# Altium PCB arm.PcbDoc
Units mm, origin at the board's own origin, x right, y up, seen from the top; angles counter-clockwise.
Board outline 152.4 x 101.6 mm, 2 copper layers (F.Cu, B.Cu); 12 components, 83 nets, 112 pads, 0 vias.
Unrouted connection lines stored in the file: 37.
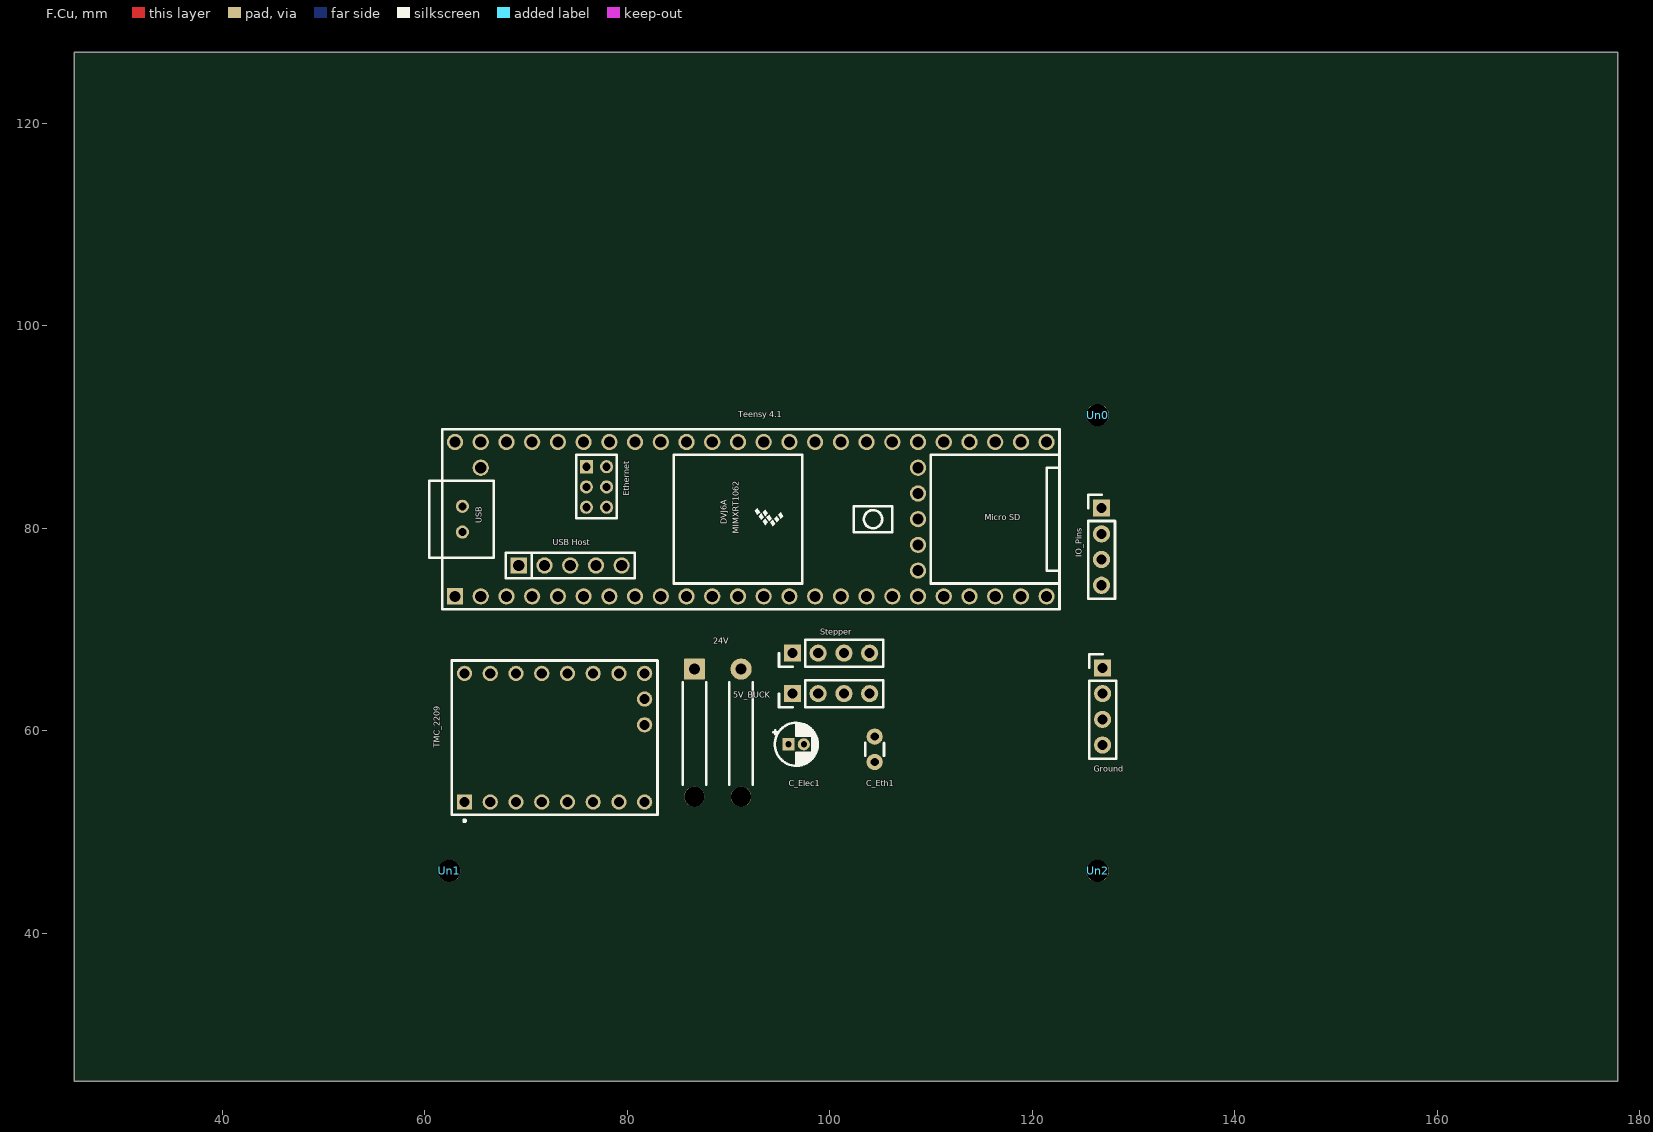
[diagram p0: F.Cu view]
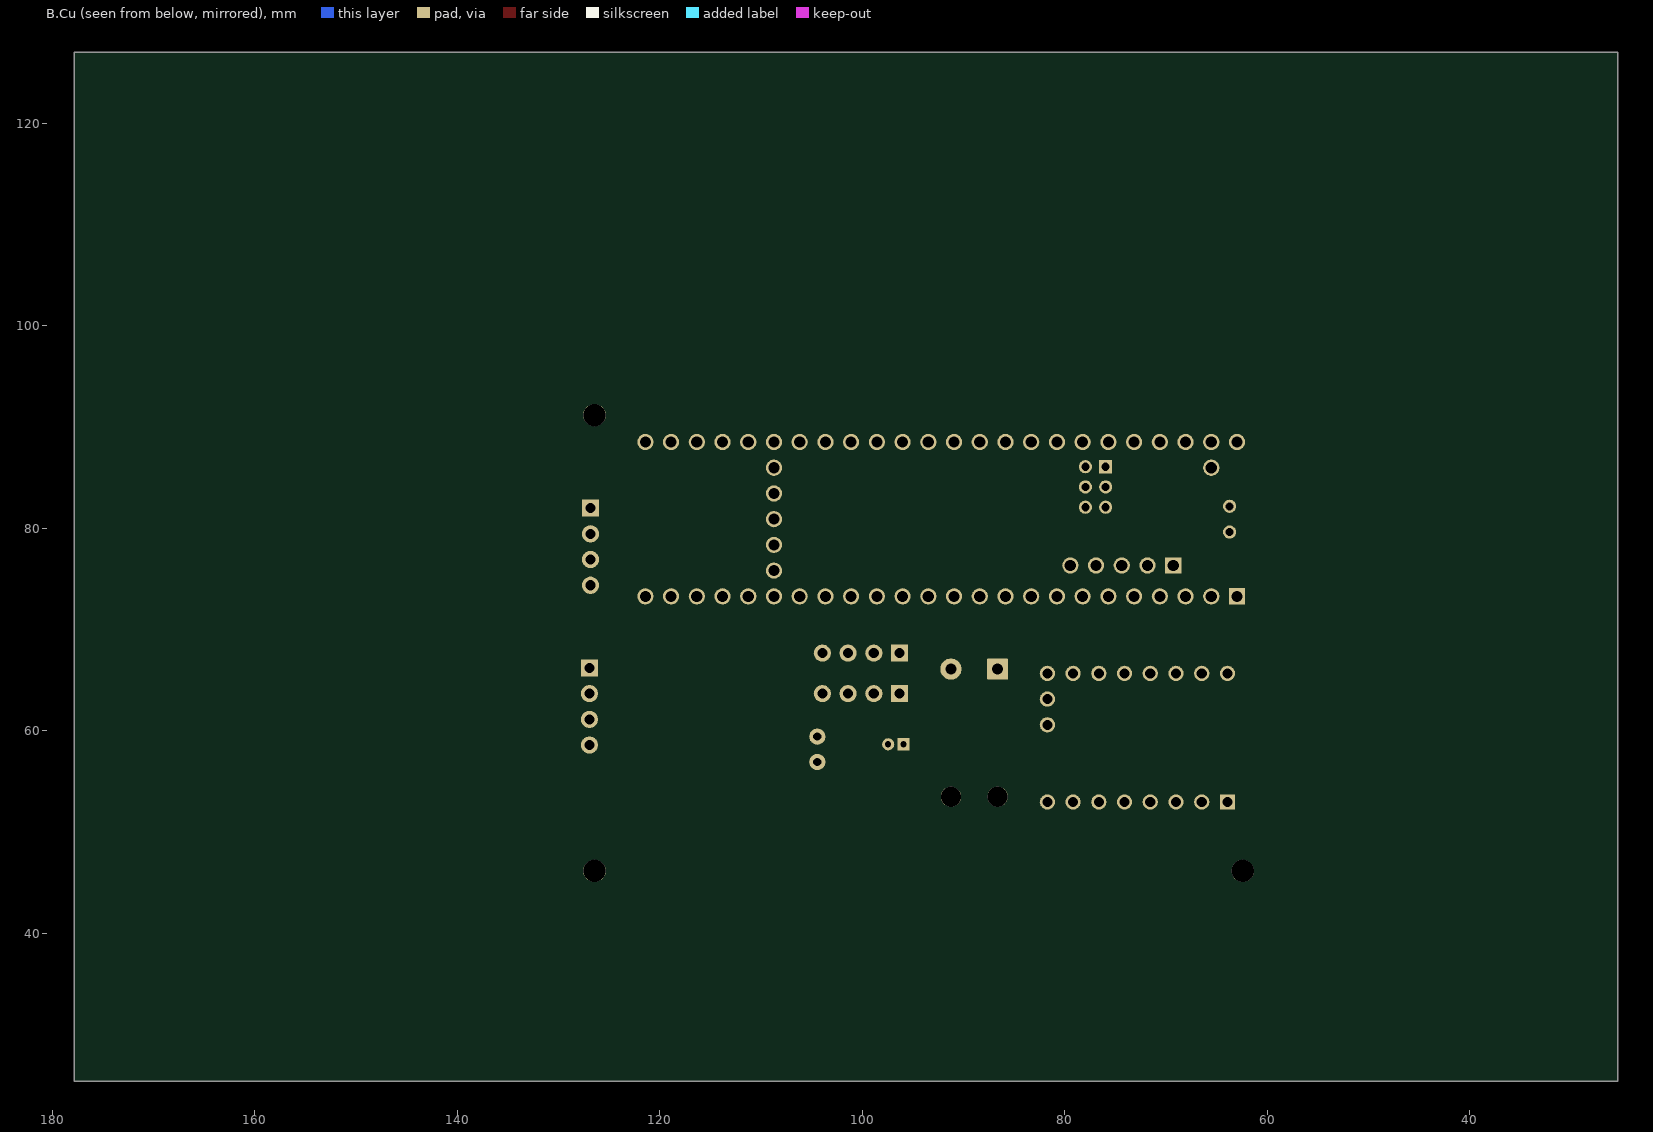
[diagram p1: B.Cu view, seen from below]

## Layer stack, top to bottom
F.Mask: solder mask 0.0102, Solder Resist, Dk 3.5
F.Cu: signal copper 0.0356
Dielectric 1: dielectric 0.32, FR-4, Dk 4.8
B.Cu: signal copper 0.0356
B.Mask: solder mask 0.0102, Solder Resist, Dk 3.5

## Board outline
25.4,25.4 177.8,25.4 177.8,127 25.4,127

## Design rules (kind name [scope] priority, off if disabled: settings)
RoutingVias [All] p1: holewidth=0.711 width=1.27 viastyle="Through Hole" minholewidth=0.711 minwidth=1.27 maxholewidth=0.711 maxwidth=1.27
SolderMaskExpansion [All] p1: expansion=0.102 istentingtop=FALSE
29 further rules are at their usual default settings.

## Components (designator, comment, footprint, x,y, rotation, side; value= is the part's Value field where it differs from the comment)
5V_BUCK "Comment" PinHeader_1x04_P2.54mm_Vertical 96.315,63.672 r90 top value=PololuD24V5F5
24V "Comment" SolderWire-0.5sqmm_1x02_P4.6mm_D0.9mm_OD2.1mm_Relief 86.635,66.097 r0 top value=24V
C_Elec1 "Comment" CP_Radial_D4.0mm_P1.50mm 95.935,58.672 r0 top value=C_Large
C_Eth1 "Comment" C_Disc_D3.0mm_W1.6mm_P2.50mm 104.435,59.422 r270 top value=C_Small
Ground "Comment" PinHeader_1x04_P2.54mm_Vertical 126.935,66.212 r0 top value=Output
IO_Pins "Comment" PinHeader_1x04_P2.54mm_Vertical 126.835,81.992 r0 top value=Output
Stepper "Comment" PinHeader_1x04_P2.54mm_Vertical 96.315,67.672 r90 top value=Output
"Teensy 4.1" "Comment" Teensy41 92.202,80.899 r0 top value=Teensy4.1
TMC_2209 "Comment" MODULE_TMC2209_SILENTSTEPSTICK 72.825,59.322 r90 top value=TMC2209_SILENTSTEPSTICK
Un0 "Comment" ? 126.435,91.172 r0 top
Un1 "Comment" ? 62.435,46.172 r0 top
Un2 "Comment" ? 126.435,46.172 r0 top

## Footprints (in the part's own frame and the unit in brackets; to place one, negate y for a bottom-side part, rotate by r counter-clockwise, add the part's x,y. Pads: shape width x height; smd on the part's side, far side on the other; paste and mask are expansions set on the pad)
C_Disc_D3.0mm_W1.6mm_P2.50mm [mm]
  round 1.6 hole 0.8 paste-1.6 mask+0: 1(0,0) 2(2.5,0)
  silkscreen extent 0.62,-0.92 1.88,0.92
CP_Radial_D4.0mm_P1.50mm [mm]
  rect 1.2x1.2 hole 0.6 paste-1.2 mask+0: 1(0,0)
  round 1.2 hole 0.6 paste-1.2 mask+0: 2(1.5,0)
  silkscreen extent -1.52,-2.12 2.87,2.12
MODULE_TMC2209_SILENTSTEPSTICK [mm]
  rect 1.508x1.508 hole 1 paste-1.508 mask+0.102: 1(-6.35,8.89)
  round 1.508 hole 1 paste-1.508 mask+0.102: 2(-6.35,6.35) 3(-6.35,3.81) 4(-6.35,1.27) 5(-6.35,-1.27) 6(-6.35,-3.81) 7(-6.35,-6.35) 8(-6.35,-8.89) 9(6.35,8.89) 10(6.35,6.35) 11(6.35,3.81) 12(6.35,1.27) 13(6.35,-1.27) 14(6.35,-3.81) 15(6.35,-6.35) 16(6.35,-8.89) 17(1.27,-8.89) 18(3.81,-8.89)
  silkscreen extent -8.3,-10.16 7.62,10.16
PinHeader_1x04_P2.54mm_Vertical [mm]
  rect 1.7x1.7 hole 1 paste-1.7 mask+0: 1(0,0)
  rrect100% 1.7x1.7 hole 1 paste-1.7 mask+0: 2(0,-2.54) 3(0,-5.08) 4(0,-7.62)
  silkscreen extent -1.33,-8.95 1.33,1.33
SolderWire-0.5sqmm_1x02_P4.6mm_D0.9mm_OD2.1mm_Relief [mm]
  rrect12% 2.1x2.1 hole 1.1 paste-2.1 mask+0: 1(0,0)
  round 2.1 hole 1.1 paste-2.1 mask+0: 2(4.6,0)
  round 2 hole 2 paste-2 mask+0: Un1(0,-12.6) Un2(4.6,-12.6)
  silkscreen extent -1.16,-11.44 5.76,-1.31
Teensy41 [mm]
  rect 1.6x1.6 hole 1.1 paste-1.6 mask+0: 1(-29.21,-7.62) 55(-22.911,-4.569)
  round 1.6 hole 1.1 paste-1.6 mask+0: 2(-26.67,-7.62) 3(-24.13,-7.62) 4(-21.59,-7.62) 5(-19.05,-7.62) 6(-16.51,-7.62) 7(-13.97,-7.62) 8(-11.43,-7.62) 9(-8.89,-7.62) 10(-6.35,-7.62) 11(-3.81,-7.62) 12(-1.27,-7.62) 13(1.27,-7.62) 14(3.81,-7.62) 15(6.35,-7.62) 16(8.89,-7.62) 17(11.43,-7.62) 18(13.97,-7.62) 19(16.51,-7.62) 20(19.05,-7.62) 21(21.59,-7.62) 22(24.13,-7.62) 23(26.67,-7.62) 24(29.21,-7.62) 25(29.21,7.62) 26(26.67,7.62) 27(24.13,7.62) 28(21.59,7.62) 29(19.05,7.62) 30(16.51,7.62) 31(13.97,7.62) 32(11.43,7.62) 33(8.89,7.62) 34(6.35,7.62) 35(3.81,7.62) 36(1.27,7.62) 37(-1.27,7.62) 38(-3.81,7.62) 39(-6.35,7.62) 40(-8.89,7.62) 41(-11.43,7.62) 42(-13.97,7.62) 43(-16.51,7.62) 44(-19.05,7.62) 45(-21.59,7.62) 46(-24.13,7.62) 47(-26.67,7.62) 48(-29.21,7.62) 49(-26.67,5.08) 50(16.51,-5.08) 51(16.51,-2.54) 52(16.51,0) 53(16.51,2.54) 54(16.51,5.08) 56(-20.371,-4.569) 57(-17.831,-4.569) 58(-15.291,-4.569) 59(-12.751,-4.569)
  rect 1.3x1.3 hole 0.8 paste-1.3 mask+0: 60(-16.24,5.182)
  round 1.3 hole 0.8 paste-1.3 mask+0: 61(-16.24,3.182) 62(-16.24,1.182) 63(-14.24,1.182) 64(-14.24,3.182) 65(-14.24,5.182) 66(-28.48,1.27) 67(-28.48,-1.27)
  silkscreen extent -31.75,-8.89 30.48,8.89
? [mm]
  round 2.2 hole 2.2 paste-2.2 mask+0: Un1(0,0)

## Part data
5V_BUCK Ground IO_Pins Stepper: library part PinHeader_1x04_P2.54mm_Vertical, "Through hole straight pin header, 1x04, 2.54mm pitch, single row", Footprint=Connector_PinHeader_2.54mm:PinHeader_1x04_P2.54mm_Vertical
  Ground IO_Pins Stepper: Description="Generic connector, single row, 01x04, script generated (kicad-library-utils/schlib/autogen/connector/)", ki_fp_filters=Connector*:*_1x??_*
24V: library part SolderWire-0.5sqmm_1x02_P4.6mm_D0.9mm_OD2.1mm_Relief, "Soldered wire connection with feed through strain relief, for 2 times 0.5 mm² wires, basic insulation, conductor diameter 0.9mm, outer diameter 2.1mm, size source Multi-Contact FLEXI-E 0.5 (https://ec.staubli.com/AcroFiles/Catalogues/TM_Cab-Main-11014119_(en)_hi.pdf), bend radius 3 times outer diameter, generated with kicad-footprint-generator", Footprint=Connector_Wire:SolderWire-0.5sqmm_1x02_P4.6mm_D0.9mm_OD2.1mm_Relief, Description="Generic connector, single row, 01x02, script generated (kicad-library-utils/schlib/autogen/connector/)", ki_fp_filters=Connector*:*_1x??_*
C_Elec1: library part CP_Radial_D4.0mm_P1.50mm, "CP, Radial series, Radial, pin pitch=1.50mm, , diameter=4mm, Electrolytic Capacitor", Footprint=Capacitor_THT:CP_Radial_D4.0mm_P1.50mm, Description="Unpolarized capacitor, small symbol", ki_fp_filters=C_*
C_Eth1: library part C_Disc_D3.0mm_W1.6mm_P2.50mm, "C, Disc series, Radial, pin pitch=2.50mm, , diameter*width=3.0*1.6mm^2, Capacitor, http://www.vishay.com/docs/45233/krseries.pdf", Footprint=Capacitor_THT:C_Disc_D3.0mm_W1.6mm_P2.50mm, Description="Unpolarized capacitor, small symbol", ki_fp_filters=C_*
"Teensy 4.1": library part Teensy41, Footprint=Teensy:Teensy41
TMC_2209: library part MODULE_TMC2209_SILENTSTEPSTICK, Footprint=Bigtreetech_TMC2209:MODULE_TMC2209_SILENTSTEPSTICK, SNAPEDA_PN="TMC2209 SILENTSTEPSTICK"

## Nets (pads, with @x,y where several pads share a name; then routed paths per layer and width w, separated by ;. In a path a pad name is that pad's centre, name@x,y a point inside that pad or via, vN(x,y) a via of type N, cw(c..) or ccw(c..) an arc to the next point about the centre after c; other vN are vias at no path point)
A1: Stepper.1 TMC_2209.3
A2: Stepper.2 TMC_2209.4
B1: Stepper.3 TMC_2209.5
B2: Stepper.4 TMC_2209.6
Net-(24V1-Pin_1): 5V_BUCK.3 24V.1 "Teensy 4.1.47" C_Elec1.2 Ground.1 Ground.2 Ground.3 Ground.4 TMC_2209.1 TMC_2209.7
Net-(24V1-Pin_2): 5V_BUCK.2 24V.2 C_Elec1.1 TMC_2209.8
Net-(Ethernet1-CTR): C_Eth1.1
Net-(Ethernet1-GND): "Teensy 4.1.64" C_Eth1.2
Net-(Ethernet1-LA): "Teensy 4.1.61"
Net-(Ethernet1-RD+): "Teensy 4.1.60"
Net-(Ethernet1-RD-): "Teensy 4.1.65"
Net-(Ethernet1-TD+): "Teensy 4.1.63"
Net-(Ethernet1-TD-): "Teensy 4.1.62"
Net-(Ext_IO1-Pin_1): "Teensy 4.1.45" IO_Pins.1
Net-(Ext_IO1-Pin_2): "Teensy 4.1.44" IO_Pins.2
Net-(Ext_IO1-Pin_3): "Teensy 4.1.41" IO_Pins.3
Net-(Ext_IO1-Pin_4): "Teensy 4.1.40" IO_Pins.4
Net-(Pwr_Cnvt1-Vout): 5V_BUCK.4 "Teensy 4.1.48"
Net-(TMC_2209-DIR): "Teensy 4.1.6" TMC_2209.9
Net-(TMC_2209-RX): "Teensy 4.1.3" TMC_2209.13
Net-(TMC_2209-STEP): "Teensy 4.1.5" TMC_2209.10
Net-(TMC_2209-TX): "Teensy 4.1.2" TMC_2209.12
Net-(TMC_2209-VIO): "Teensy 4.1.46" TMC_2209.2
Net-(TMC_2209-{\E\N\}\)\: "Teensy 4.1.4" TMC_2209.16
unconnected-(Ethernet1-PadS1): 
unconnected-(Ethernet1-PadS2): 
unconnected-(Ethernet1-RA-Pad12): 
unconnected-(Ethernet1-RC-Pad11): 
unconnected-(Pwr_Cnvt1-SHDN-Pad1): 5V_BUCK.1
unconnected-(Teensy1-3V3-Pad15): "Teensy 4.1.15"
unconnected-(Teensy1-3V3-Pad51): "Teensy 4.1.51"
unconnected-(Teensy1-5_IN2-Pad7): "Teensy 4.1.7"
unconnected-(Teensy1-5V-Pad55): "Teensy 4.1.55"
unconnected-(Teensy1-6_OUT1D-Pad8): "Teensy 4.1.8"
unconnected-(Teensy1-7_RX2_OUT1A-Pad9): "Teensy 4.1.9"
unconnected-(Teensy1-8_TX2_IN1-Pad10): "Teensy 4.1.10"
unconnected-(Teensy1-9_OUT1C-Pad11): "Teensy 4.1.11"
unconnected-(Teensy1-10_CS_MQSR-Pad12): "Teensy 4.1.12"
unconnected-(Teensy1-11_MOSI_CTX1-Pad13): "Teensy 4.1.13"
unconnected-(Teensy1-12_MISO_MQSL-Pad14): "Teensy 4.1.14"
unconnected-(Teensy1-13_SCK_LED-Pad35): "Teensy 4.1.35"
unconnected-(Teensy1-14_A0_TX3_SPDIF_OUT-Pad36): "Teensy 4.1.36"
unconnected-(Teensy1-15_A1_RX3_SPDIF_IN-Pad37): "Teensy 4.1.37"
unconnected-(Teensy1-16_A2_RX4_SCL1-Pad38): "Teensy 4.1.38"
unconnected-(Teensy1-17_A3_TX4_SDA1-Pad39): "Teensy 4.1.39"
unconnected-(Teensy1-20_A6_TX5_LRCLK1-Pad42): "Teensy 4.1.42"
unconnected-(Teensy1-21_A7_RX5_BCLK1-Pad43): "Teensy 4.1.43"
unconnected-(Teensy1-24_A10_TX6_SCL2-Pad16): "Teensy 4.1.16"
unconnected-(Teensy1-25_A11_RX6_SDA2-Pad17): "Teensy 4.1.17"
unconnected-(Teensy1-26_A12_MOSI1-Pad18): "Teensy 4.1.18"
unconnected-(Teensy1-27_A13_SCK1-Pad19): "Teensy 4.1.19"
unconnected-(Teensy1-28_RX7-Pad20): "Teensy 4.1.20"
unconnected-(Teensy1-29_TX7-Pad21): "Teensy 4.1.21"
unconnected-(Teensy1-30_CRX3-Pad22): "Teensy 4.1.22"
unconnected-(Teensy1-31_CTX3-Pad23): "Teensy 4.1.23"
unconnected-(Teensy1-32_OUT1B-Pad24): "Teensy 4.1.24"
unconnected-(Teensy1-33_MCLK2-Pad25): "Teensy 4.1.25"
unconnected-(Teensy1-34_RX8-Pad26): "Teensy 4.1.26"
unconnected-(Teensy1-35_TX8-Pad27): "Teensy 4.1.27"
unconnected-(Teensy1-36_CS-Pad28): "Teensy 4.1.28"
unconnected-(Teensy1-37_CS-Pad29): "Teensy 4.1.29"
unconnected-(Teensy1-38_CS1_IN1-Pad30): "Teensy 4.1.30"
unconnected-(Teensy1-39_MISO1_OUT1A-Pad31): "Teensy 4.1.31"
unconnected-(Teensy1-40_A16-Pad32): "Teensy 4.1.32"
unconnected-(Teensy1-41_A17-Pad33): "Teensy 4.1.33"
unconnected-(Teensy1-D+-Pad57): "Teensy 4.1.57"
unconnected-(Teensy1-D+-Pad67): "Teensy 4.1.67"
unconnected-(Teensy1-D--Pad56): "Teensy 4.1.56"
unconnected-(Teensy1-D--Pad66): "Teensy 4.1.66"
unconnected-(Teensy1-GND-Pad1): "Teensy 4.1.1"
unconnected-(Teensy1-GND-Pad34): "Teensy 4.1.34"
unconnected-(Teensy1-GND-Pad52): "Teensy 4.1.52"
unconnected-(Teensy1-GND-Pad58): "Teensy 4.1.58"
unconnected-(Teensy1-GND-Pad59): "Teensy 4.1.59"
unconnected-(Teensy1-ON_OFF-Pad54): "Teensy 4.1.54"
unconnected-(Teensy1-PROGRAM-Pad53): "Teensy 4.1.53"
unconnected-(Teensy1-VBAT-Pad50): "Teensy 4.1.50"
unconnected-(Teensy1-VUSB-Pad49): "Teensy 4.1.49"
unconnected-(TMC_2209-CLK-Pad11): TMC_2209.11
unconnected-(TMC_2209-DIAG-Pad18): TMC_2209.18
unconnected-(TMC_2209-INDEX-Pad17): TMC_2209.17
unconnected-(TMC_2209-MS1-Pad15): TMC_2209.15
unconnected-(TMC_2209-MS2-Pad14): TMC_2209.14
pads on no net: 24V.Un1 24V.Un2 Un0.Un1 Un1.Un1 Un2.Un1

## Text inside footprints (layer, text, board x,y; h text height)
"Teensy 4.1": F.SilkS "USB Host" at 72.665,78.124 h1; F.SilkS "USB" at 65.817,80.49 h1 r90; F.SilkS "DVJ6A" at 90.025,80.413 h1 r90; F.SilkS "MIMXRT1062" at 91.217,79.446 h1 r90; F.SilkS "Micro SD" at 115.316,80.613 h1; F.SilkS "Ethernet" at 80.419,83.206 h1 r90